# EAGLE board 01A-005-A1-01 (EAGLE 9.6.2)
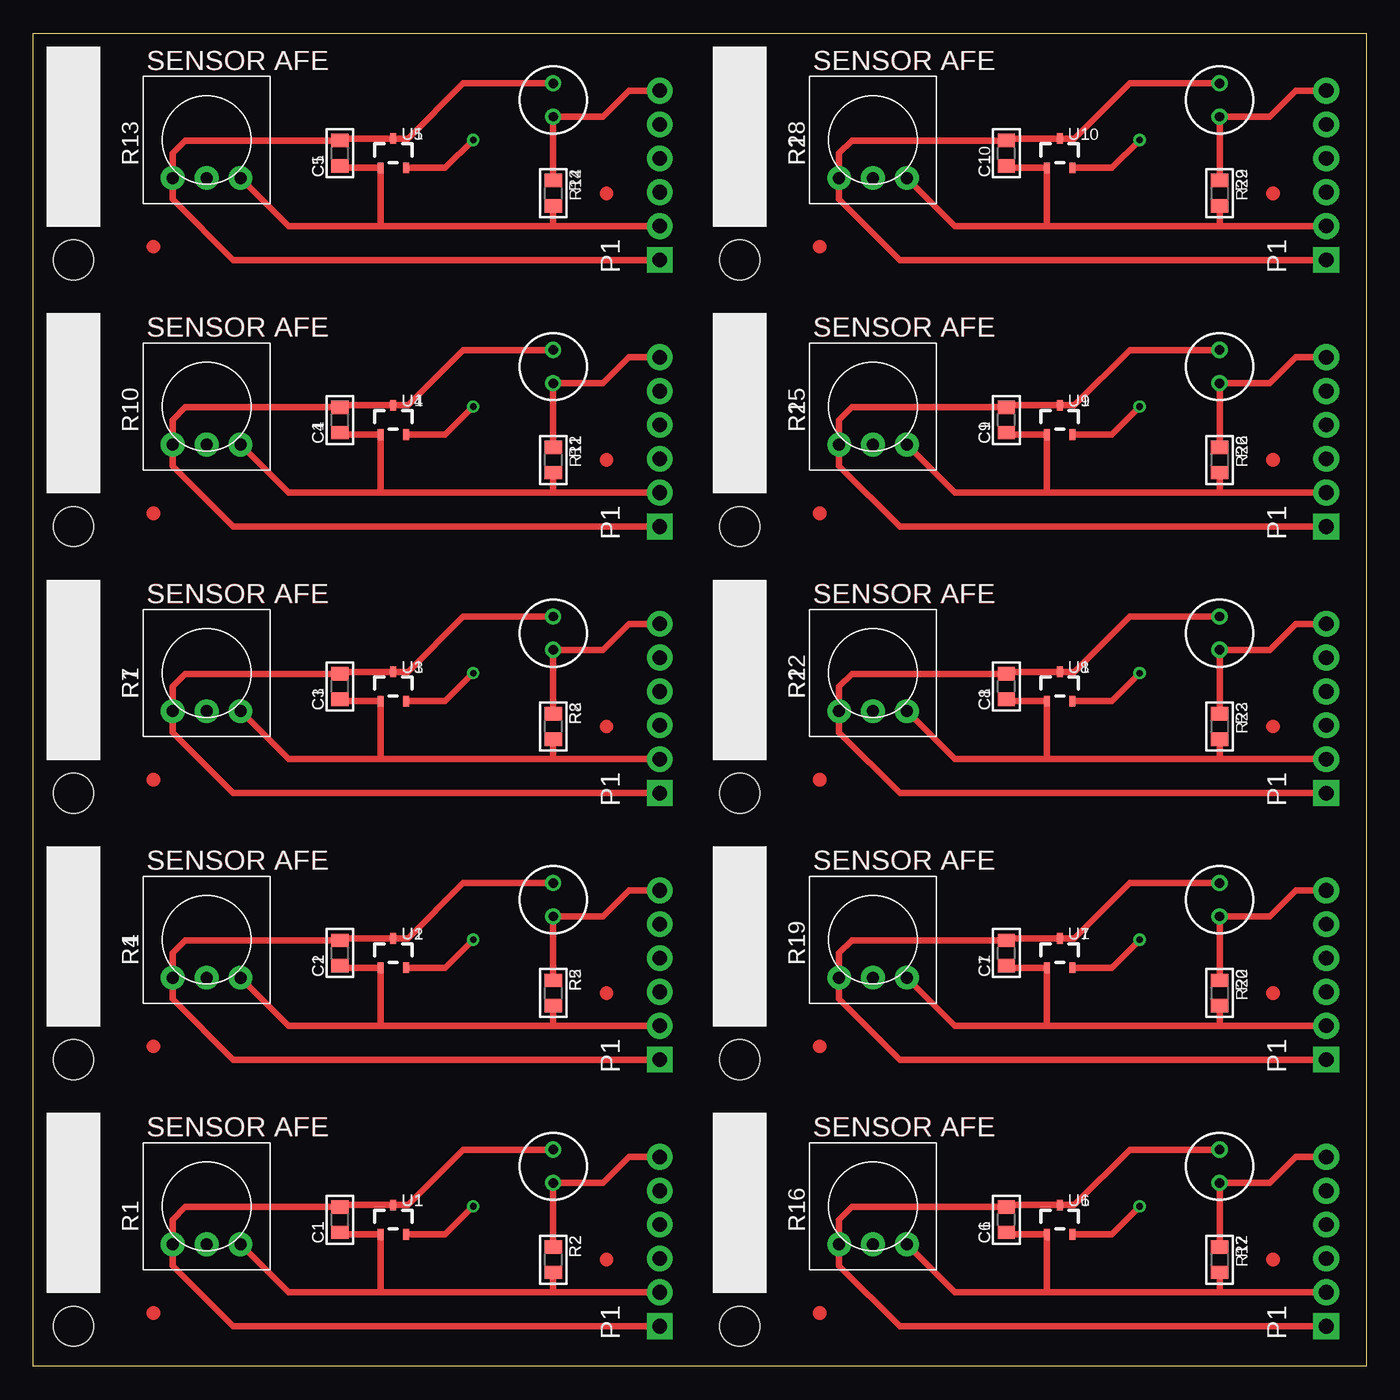
[diagram p0: board, top side]
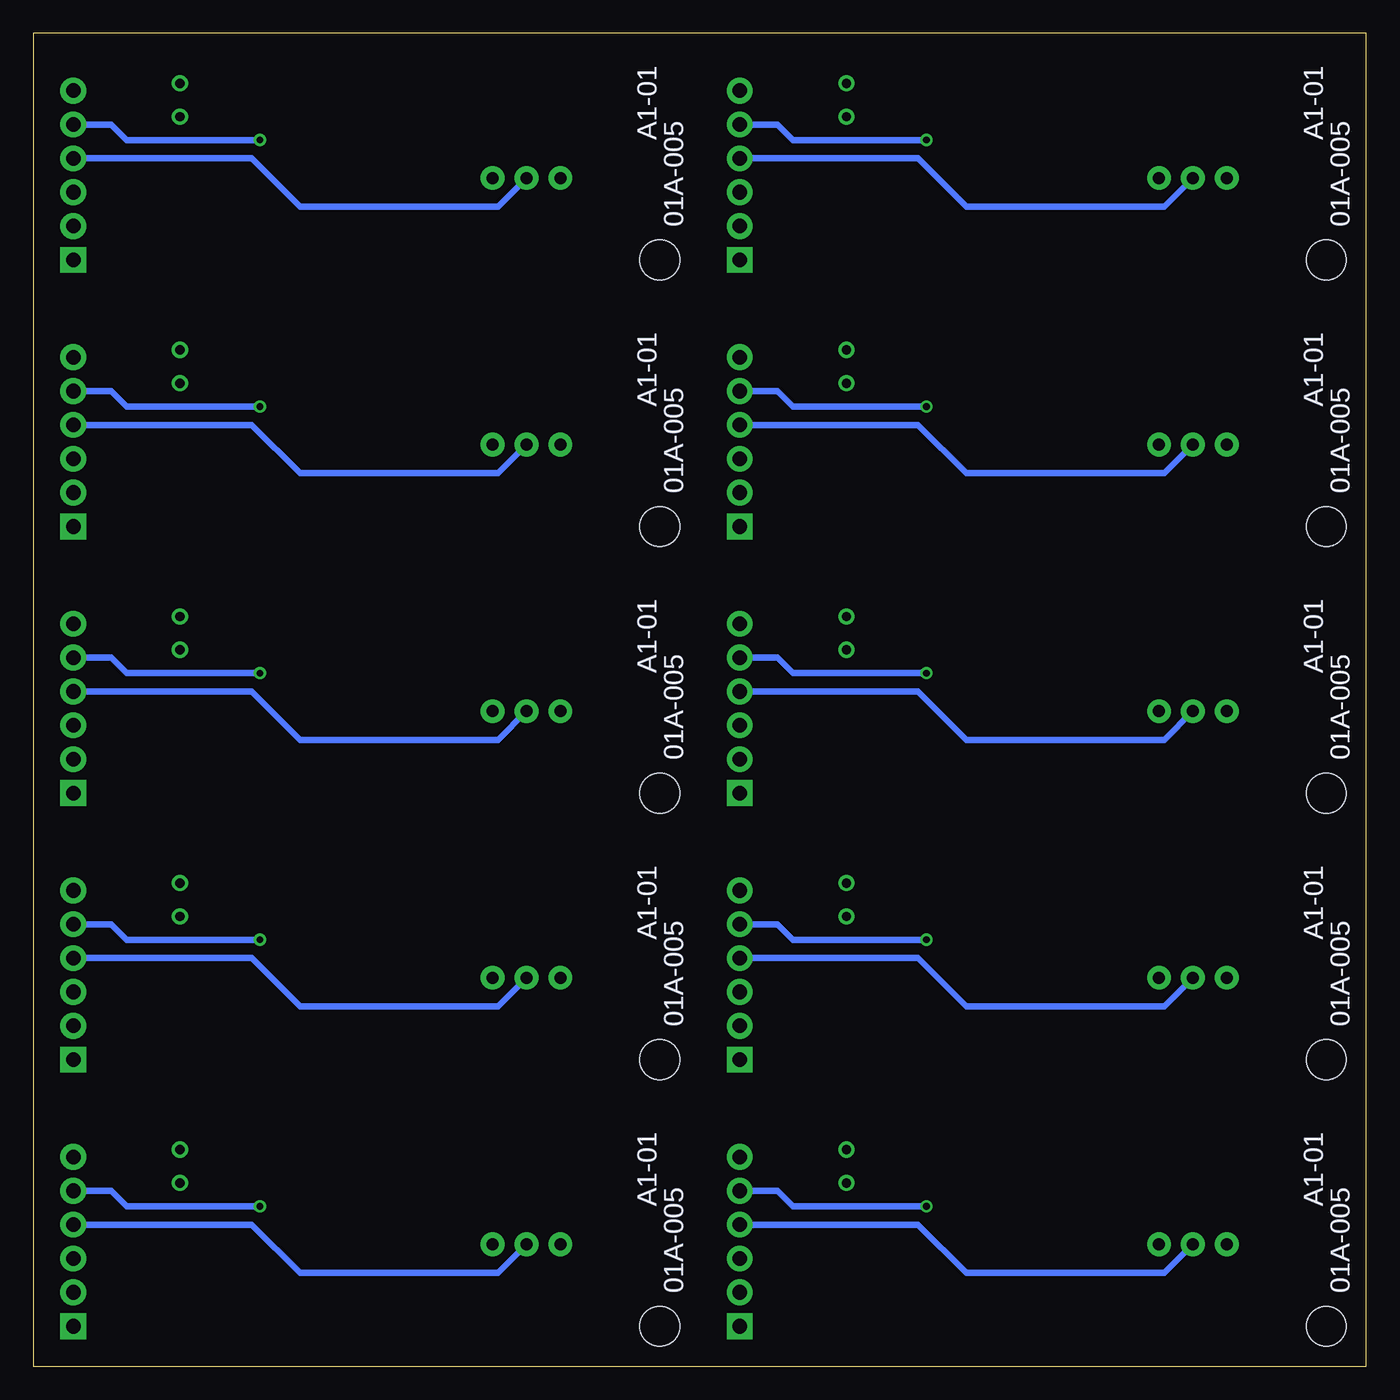
[diagram p1: board, bottom side, seen from below]

Size 100 x 100 mm. Coordinates in mm from the lower left corner, seen from the top.
Outline: 0,0 0,100 100,100 100,0 0,0
Copper layers (1*16): Top 0.035mm / dielectric 1.5mm / Bottom 0.035mm
Design rules "default": minimum track width 6mil, minimum drill 0.35mm, track to track 6mil, track to pad 6mil, pad to pad 6mil, via to via 6mil, smd to smd 6mil, copper to edge 40mil, drill to drill 6mil, minimum pad ring 10mil, minimum via ring 8mil, stop-mask expansion 4mil, vias tented up to drill 0mil, thermal gap 10mil

## Footprints (pad centres in the part's own frame; a part is rotated, then mirrored left to right if it is on the bottom)
C0805 = smd 1 x 1.3: 1ASD -0.95,0; 2ASDF 0.95,0
PINS_6 = drill 1.1 pad 1.93 square: 1 0,0 | drill 1.1 pad 1.93: 2 2.54,0; 3 5.08,0; 4 7.62,0; 5 10.16,0; 6 12.7,0
MINIPCB_00A_20X50 = hole 3: 3,3
TRIM-3386 = drill 0.9 pad 1.778: 1 -2.54,-2.857; 2 0,-2.857; 3 2.54,-2.857
R0805 = smd 1 x 1.3: 1 -0.95,0; 2 0.95,0
CERAMICPHOTOCELL = drill 0.7: P$1 -1.25,0; P$2 1.25,0
FIDUCIAL = smd 0 x 0: FIDUCIAL 0,0
SOT23 = smd 0.45 x 0.8: 1 -0.95,-1.1; 2 0.95,-1.1; 3 0,1.1

## Placement (x,y rotation side)
C1  [C0805]  23,11 90 top
C2  [C0805]  23,31 90 top
C3  [C0805]  23,51 90 top
C4  [C0805]  23,71 90 top
C5  [C0805]  23,91 90 top
C6  [C0805]  73,11 90 top
C7  [C0805]  73,31 90 top
C8  [C0805]  73,51 90 top
C9  [C0805]  73,71 90 top
C10  [C0805]  73,91 90 top
P1  [PINS_6]  47,3 90 top
P2  [PINS_6]  47,23 90 top
P3  [PINS_6]  47,43 90 top
P4  [PINS_6]  47,63 90 top
P5  [PINS_6]  47,83 90 top
P6  [PINS_6]  97,3 90 top
P7  [PINS_6]  97,23 90 top
P8  [PINS_6]  97,43 90 top
P9  [PINS_6]  97,63 90 top
P10  [PINS_6]  97,83 90 top
PCB1  MAIN CONNECTOR  [MINIPCB_00A_20X50]  0,0 0 top
PCB2  MAIN CONNECTOR  [MINIPCB_00A_20X50]  0,20 0 top
PCB3  MAIN CONNECTOR  [MINIPCB_00A_20X50]  0,40 0 top
PCB4  MAIN CONNECTOR  [MINIPCB_00A_20X50]  0,60 0 top
PCB5  MAIN CONNECTOR  [MINIPCB_00A_20X50]  0,80 0 top
PCB6  MAIN CONNECTOR  [MINIPCB_00A_20X50]  50,0 0 top
PCB7  MAIN CONNECTOR  [MINIPCB_00A_20X50]  50,20 0 top
PCB8  MAIN CONNECTOR  [MINIPCB_00A_20X50]  50,40 0 top
PCB9  MAIN CONNECTOR  [MINIPCB_00A_20X50]  50,60 0 top
PCB10  MAIN CONNECTOR  [MINIPCB_00A_20X50]  50,80 0 top
R1  3386  [TRIM-3386]  13,12 0 top
R2  [R0805]  39,8 270 top
R3  NSL-5162  [CERAMICPHOTOCELL]  39,15 90 top
R4  3386  [TRIM-3386]  13,32 0 top
R5  [R0805]  39,28 270 top
R6  NSL-5162  [CERAMICPHOTOCELL]  39,35 90 top
R7  3386  [TRIM-3386]  13,52 0 top
R8  [R0805]  39,48 270 top
R9  NSL-5162  [CERAMICPHOTOCELL]  39,55 90 top
R10  3386  [TRIM-3386]  13,72 0 top
R11  [R0805]  39,68 270 top
R12  NSL-5162  [CERAMICPHOTOCELL]  39,75 90 top
R13  3386  [TRIM-3386]  13,92 0 top
R14  [R0805]  39,88 270 top
R15  NSL-5162  [CERAMICPHOTOCELL]  39,95 90 top
R16  3386  [TRIM-3386]  63,12 0 top
R17  [R0805]  89,8 270 top
R18  NSL-5162  [CERAMICPHOTOCELL]  89,15 90 top
R19  3386  [TRIM-3386]  63,32 0 top
R20  [R0805]  89,28 270 top
R21  NSL-5162  [CERAMICPHOTOCELL]  89,35 90 top
R22  3386  [TRIM-3386]  63,52 0 top
R23  [R0805]  89,48 270 top
R24  NSL-5162  [CERAMICPHOTOCELL]  89,55 90 top
R25  3386  [TRIM-3386]  63,72 0 top
R26  [R0805]  89,68 270 top
R27  NSL-5162  [CERAMICPHOTOCELL]  89,75 90 top
R28  3386  [TRIM-3386]  63,92 0 top
R29  [R0805]  89,88 270 top
R30  NSL-5162  [CERAMICPHOTOCELL]  89,95 90 top
TP1  [FIDUCIAL]  9,4 0 top
TP2  [FIDUCIAL]  43,8 0 top
TP3  [FIDUCIAL]  9,24 0 top
TP4  [FIDUCIAL]  43,28 0 top
TP5  [FIDUCIAL]  9,44 0 top
TP6  [FIDUCIAL]  43,48 0 top
TP7  [FIDUCIAL]  9,64 0 top
TP8  [FIDUCIAL]  43,68 0 top
TP9  [FIDUCIAL]  9,84 0 top
TP10  [FIDUCIAL]  43,88 0 top
TP11  [FIDUCIAL]  59,4 0 top
TP12  [FIDUCIAL]  93,8 0 top
TP13  [FIDUCIAL]  59,24 0 top
TP14  [FIDUCIAL]  93,28 0 top
TP15  [FIDUCIAL]  59,44 0 top
TP16  [FIDUCIAL]  93,48 0 top
TP17  [FIDUCIAL]  59,64 0 top
TP18  [FIDUCIAL]  93,68 0 top
TP19  [FIDUCIAL]  59,84 0 top
TP20  [FIDUCIAL]  93,88 0 top
U1  MCP9700  [SOT23]  27,11 0 top
U2  MCP9700  [SOT23]  27,31 0 top
U3  MCP9700  [SOT23]  27,51 0 top
U4  MCP9700  [SOT23]  27,71 0 top
U5  MCP9700  [SOT23]  27,91 0 top
U6  MCP9700  [SOT23]  77,11 0 top
U7  MCP9700  [SOT23]  77,31 0 top
U8  MCP9700  [SOT23]  77,51 0 top
U9  MCP9700  [SOT23]  77,71 0 top
U10  MCP9700  [SOT23]  77,91 0 top

## Library data of the parts
C1-C10 P1-P10 R1-R30 TP1-TP20 U1-U10 = minipcb
PCB1-PCB10 = minipcb; CIRCUIT_CATEGORY: DISCRETE COMPONENTS; PART_NUMBER: 01A-005; REVISION: A1-01; TITLE: SENSOR AFE

## Nets
GND: C1.2ASDF P1.1 R1.1 R3.P$2 U1.3
GND1: C2.2ASDF P2.1 R4.1 R6.P$2 U2.3
GND2: C3.2ASDF P3.1 R7.1 R9.P$2 U3.3
GND3: C4.2ASDF P4.1 R10.1 R12.P$2 U4.3
GND4: C5.2ASDF P5.1 R13.1 R15.P$2 U5.3
GND5: C6.2ASDF P6.1 R16.1 R18.P$2 U6.3
GND6: C7.2ASDF P7.1 R19.1 R21.P$2 U7.3
GND7: C8.2ASDF P8.1 R22.1 R24.P$2 U8.3
GND8: C9.2ASDF P9.1 R25.1 R27.P$2 U9.3
GND9: C10.2ASDF P10.1 R28.1 R30.P$2 U10.3
N$1: P1.5 U1.2
N$2: P1.4 R1.2
N$3: P1.6 R2.1 R3.P$1
N$4: P2.5 U2.2
N$5: P2.4 R4.2
N$6: P2.6 R5.1 R6.P$1
N$7: P3.5 U3.2
N$8: P3.4 R7.2
N$9: P3.6 R8.1 R9.P$1
N$10: P4.5 U4.2
N$11: P4.4 R10.2
N$12: P4.6 R11.1 R12.P$1
N$13: P5.5 U5.2
N$14: P5.4 R13.2
N$15: P5.6 R14.1 R15.P$1
N$16: P6.5 U6.2
N$17: P6.4 R16.2
N$18: P6.6 R17.1 R18.P$1
N$19: P7.5 U7.2
N$20: P7.4 R19.2
N$21: P7.6 R20.1 R21.P$1
N$22: P8.5 U8.2
N$23: P8.4 R22.2
N$24: P8.6 R23.1 R24.P$1
N$25: P9.5 U9.2
N$26: P9.4 R25.2
N$27: P9.6 R26.1 R27.P$1
N$28: P10.5 U10.2
N$29: P10.4 R28.2
N$30: P10.6 R29.1 R30.P$1
V+: C1.1ASD P1.2 R1.3 R2.2 U1.1
V+1: C2.1ASD P2.2 R4.3 R5.2 U2.1
V+2: C3.1ASD P3.2 R7.3 R8.2 U3.1
V+3: C4.1ASD P4.2 R10.3 R11.2 U4.1
V+4: C5.1ASD P5.2 R13.3 R14.2 U5.1
V+5: C6.1ASD P6.2 R16.3 R17.2 U6.1
V+6: C7.1ASD P7.2 R19.3 R20.2 U7.1
V+7: C8.1ASD P8.2 R22.3 R23.2 U8.1
V+8: C9.1ASD P9.2 R25.3 R26.2 U9.1
V+9: C10.1ASD P10.2 R28.3 R29.2 U10.1

## Tracks (layer width: path | path; a pad name or v marks a point on that pad's centre or on a via)
GND
  Top 0.5: P1.1 15,3 10.46,7.54 R1.1 10.46,10 10.46,10.46 10.46,11 11.41,11.95 C1.2ASDF 23.15,12.1 U1.3 28.1,12.1 32.25,16.25 R3.P$2
GND1
  Top 0.5: P2.1 15,23 10.46,27.54 R4.1 10.46,30 10.46,30.46 10.46,31 11.41,31.95 C2.2ASDF 23.15,32.1 U2.3 28.1,32.1 32.25,36.25 R6.P$2
GND2
  Top 0.5: P3.1 15,43 10.46,47.54 R7.1 10.46,50 10.46,50.46 10.46,51 11.41,51.95 C3.2ASDF 23.15,52.1 U3.3 28.1,52.1 32.25,56.25 R9.P$2
GND3
  Top 0.5: P4.1 15,63 10.46,67.54 R10.1 10.46,70 10.46,70.46 10.46,71 11.41,71.95 C4.2ASDF 23.15,72.1 U4.3 28.1,72.1 32.25,76.25 R12.P$2
GND4
  Top 0.5: P5.1 15,83 10.46,87.54 R13.1 10.46,90 10.46,90.46 10.46,91 11.41,91.95 C5.2ASDF 23.15,92.1 U5.3 28.1,92.1 32.25,96.25 R15.P$2
GND5
  Top 0.5: P6.1 65,3 60.46,7.54 R16.1 60.46,10 60.46,10.46 60.46,11 61.41,11.95 C6.2ASDF 73.15,12.1 U6.3 78.1,12.1 82.25,16.25 R18.P$2
GND6
  Top 0.5: P7.1 65,23 60.46,27.54 R19.1 60.46,30 60.46,30.46 60.46,31 61.41,31.95 C7.2ASDF 73.15,32.1 U7.3 78.1,32.1 82.25,36.25 R21.P$2
GND7
  Top 0.5: P8.1 65,43 60.46,47.54 R22.1 60.46,50 60.46,50.46 60.46,51 61.41,51.95 C8.2ASDF 73.15,52.1 U8.3 78.1,52.1 82.25,56.25 R24.P$2
GND8
  Top 0.5: P9.1 65,63 60.46,67.54 R25.1 60.46,70 60.46,70.46 60.46,71 61.41,71.95 C9.2ASDF 73.15,72.1 U9.3 78.1,72.1 82.25,76.25 R27.P$2
GND9
  Top 0.5: P10.1 65,83 60.46,87.54 R28.1 60.46,90 60.46,90.46 60.46,91 61.41,91.95 C10.2ASDF 73.15,92.1 U10.3 78.1,92.1 82.25,96.25 R30.P$2
N$1  (via drill 0.5)
  Top 0.5: U1.2 30.9,9.9 v33,12
  Bottom 0.5: v33,12 43,12 44.16,13.16 P1.5
N$2
  Bottom 0.5: R1.2 15.14,7 30,7 33.62,10.62 P1.4
N$3
  Top 0.5: R2.1 R3.P$1 42.75,13.75 44.7,15.7 P1.6
N$4  (via drill 0.5)
  Top 0.5: U2.2 30.9,29.9 v33,32
  Bottom 0.5: v33,32 43,32 44.16,33.16 P2.5
N$5
  Bottom 0.5: R4.2 15.14,27 30,27 33.62,30.62 P2.4
N$6
  Top 0.5: R5.1 R6.P$1 42.75,33.75 44.7,35.7 P2.6
N$7  (via drill 0.5)
  Top 0.5: U3.2 30.9,49.9 v33,52
  Bottom 0.5: v33,52 43,52 44.16,53.16 P3.5
N$8
  Bottom 0.5: R7.2 15.14,47 30,47 33.62,50.62 P3.4
N$9
  Top 0.5: R8.1 R9.P$1 42.75,53.75 44.7,55.7 P3.6
N$10  (via drill 0.5)
  Top 0.5: U4.2 30.9,69.9 v33,72
  Bottom 0.5: v33,72 43,72 44.16,73.16 P4.5
N$11
  Bottom 0.5: R10.2 15.14,67 30,67 33.62,70.62 P4.4
N$12
  Top 0.5: R11.1 R12.P$1 42.75,73.75 44.7,75.7 P4.6
N$13  (via drill 0.5)
  Top 0.5: U5.2 30.9,89.9 v33,92
  Bottom 0.5: v33,92 43,92 44.16,93.16 P5.5
N$14
  Bottom 0.5: R13.2 15.14,87 30,87 33.62,90.62 P5.4
N$15
  Top 0.5: R14.1 R15.P$1 42.75,93.75 44.7,95.7 P5.6
N$16  (via drill 0.5)
  Top 0.5: U6.2 80.9,9.9 v83,12
  Bottom 0.5: v83,12 93,12 94.16,13.16 P6.5
N$17
  Bottom 0.5: R16.2 65.14,7 80,7 83.62,10.62 P6.4
N$18
  Top 0.5: R17.1 R18.P$1 92.75,13.75 94.7,15.7 P6.6
N$19  (via drill 0.5)
  Top 0.5: U7.2 80.9,29.9 v83,32
  Bottom 0.5: v83,32 93,32 94.16,33.16 P7.5
N$20
  Bottom 0.5: R19.2 65.14,27 80,27 83.62,30.62 P7.4
N$21
  Top 0.5: R20.1 R21.P$1 92.75,33.75 94.7,35.7 P7.6
N$22  (via drill 0.5)
  Top 0.5: U8.2 80.9,49.9 v83,52
  Bottom 0.5: v83,52 93,52 94.16,53.16 P8.5
N$23
  Bottom 0.5: R22.2 65.14,47 80,47 83.62,50.62 P8.4
N$24
  Top 0.5: R23.1 R24.P$1 92.75,53.75 94.7,55.7 P8.6
N$25  (via drill 0.5)
  Top 0.5: U9.2 80.9,69.9 v83,72
  Bottom 0.5: v83,72 93,72 94.16,73.16 P9.5
N$26
  Bottom 0.5: R25.2 65.14,67 80,67 83.62,70.62 P9.4
N$27
  Top 0.5: R26.1 R27.P$1 92.75,73.75 94.7,75.7 P9.6
N$28  (via drill 0.5)
  Top 0.5: U10.2 80.9,89.9 v83,92
  Bottom 0.5: v83,92 93,92 94.16,93.16 P10.5
N$29
  Bottom 0.5: R28.2 65.14,87 80,87 83.62,90.62 P10.4
N$30
  Top 0.5: R29.1 R30.P$1 92.75,93.75 94.7,95.7 P10.6
V+
  Top 0.5: R1.3 19.14,5.54 26,5.54 | 26,5.54 39,5.54 | 39,5.54 P1.2 | 26,5.54 26.05,5.59 U1.1 23.15,9.9 C1.1ASD | R2.2 39,5.54
V+1
  Top 0.5: R4.3 19.14,25.54 26,25.54 | 26,25.54 39,25.54 | 39,25.54 P2.2 | 26,25.54 26.05,25.59 U2.1 23.15,29.9 C2.1ASD | R5.2 39,25.54
V+2
  Top 0.5: R7.3 19.14,45.54 26,45.54 | 26,45.54 39,45.54 | 39,45.54 P3.2 | 26,45.54 26.05,45.59 U3.1 23.15,49.9 C3.1ASD | R8.2 39,45.54
V+3
  Top 0.5: R10.3 19.14,65.54 26,65.54 | 26,65.54 39,65.54 | 39,65.54 P4.2 | 26,65.54 26.05,65.59 U4.1 23.15,69.9 C4.1ASD | R11.2 39,65.54
V+4
  Top 0.5: R13.3 19.14,85.54 26,85.54 | 26,85.54 39,85.54 | 39,85.54 P5.2 | 26,85.54 26.05,85.59 U5.1 23.15,89.9 C5.1ASD | R14.2 39,85.54
V+5
  Top 0.5: R16.3 69.14,5.54 76,5.54 | 76,5.54 89,5.54 | 89,5.54 P6.2 | 76,5.54 76.05,5.59 U6.1 73.15,9.9 C6.1ASD | R17.2 89,5.54
V+6
  Top 0.5: R19.3 69.14,25.54 76,25.54 | 76,25.54 89,25.54 | 89,25.54 P7.2 | 76,25.54 76.05,25.59 U7.1 73.15,29.9 C7.1ASD | R20.2 89,25.54
V+7
  Top 0.5: R22.3 69.14,45.54 76,45.54 | 76,45.54 89,45.54 | 89,45.54 P8.2 | 76,45.54 76.05,45.59 U8.1 73.15,49.9 C8.1ASD | R23.2 89,45.54
V+8
  Top 0.5: R25.3 69.14,65.54 76,65.54 | 76,65.54 89,65.54 | 89,65.54 P9.2 | 76,65.54 76.05,65.59 U9.1 73.15,69.9 C9.1ASD | R26.2 89,65.54
V+9
  Top 0.5: R28.3 69.14,85.54 76,85.54 | 76,85.54 89,85.54 | 89,85.54 P10.2 | 76,85.54 76.05,85.59 U10.1 73.15,89.9 C10.1ASD | R29.2 89,85.54

## Text on the board
_tNames: U1 | U1 | R1 | R2 | R1 | R2 | C1 | C1 | P1 | P1 | U1 | U1 | R1 | R2 | R1 | R2 | C1 | C1 | P1 | P1 | U1 | U1 | R1 | R2 | R1 | R2 | C1 | C1 | P1 | P1 | U1 | U1 | R1 | R2 | R1 | R2 | C1 | C1 | P1 | P1 | U1 | U1 | R1 | R2 | R1 | R2 | C1 | C1 | P1 | P1